# Altium PCB Diffusor_1.3.PcbDoc
Units mm, origin at the board's own origin, x right, y up, seen from the top; angles counter-clockwise.
Board outline 55 x 44.5 mm, 2 copper layers (Top Layer, Bottom Layer), stack 1.571 mm thick; 81 components, 55 nets, 236 pads, 1 vias.
Unrouted connection lines stored in the file: 1.
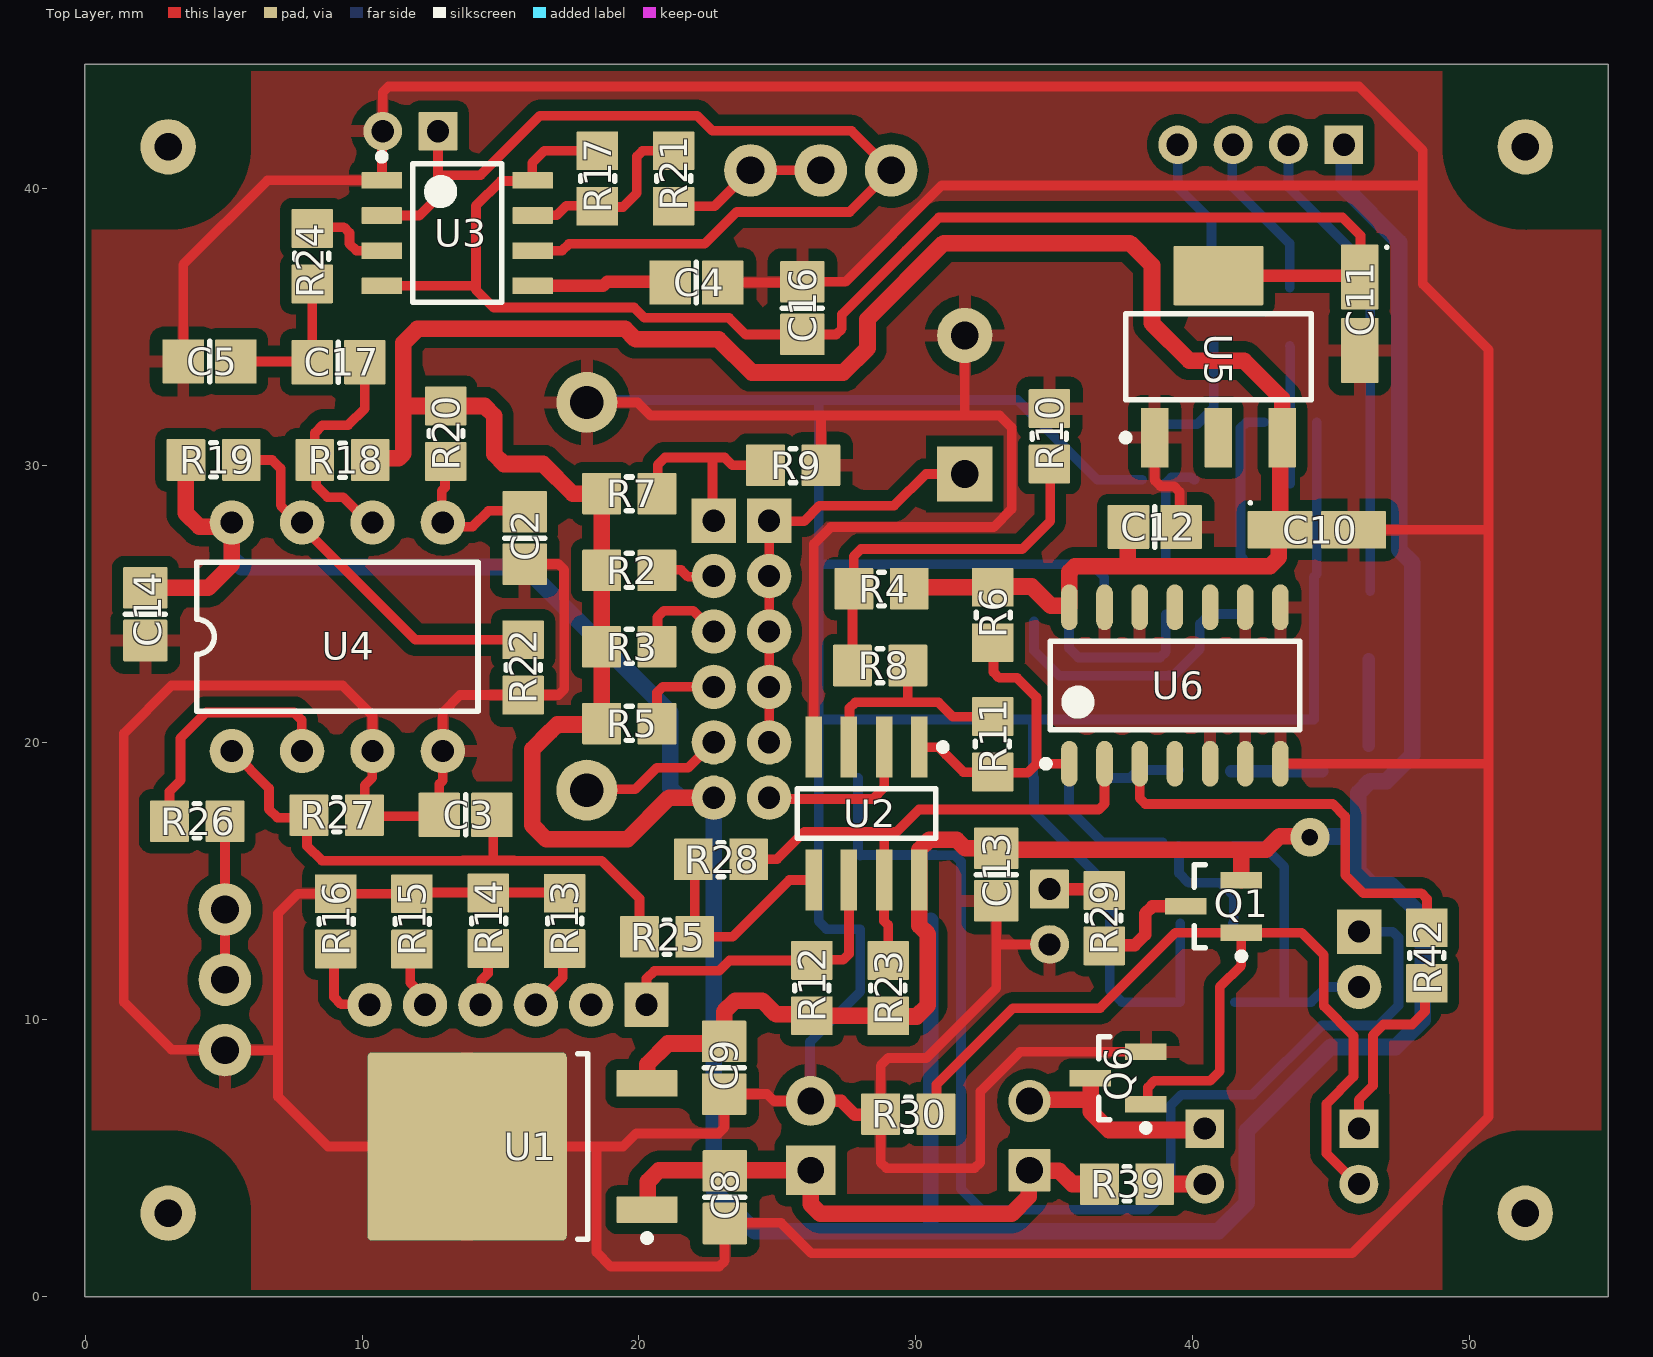
[diagram p0: Top Layer view]
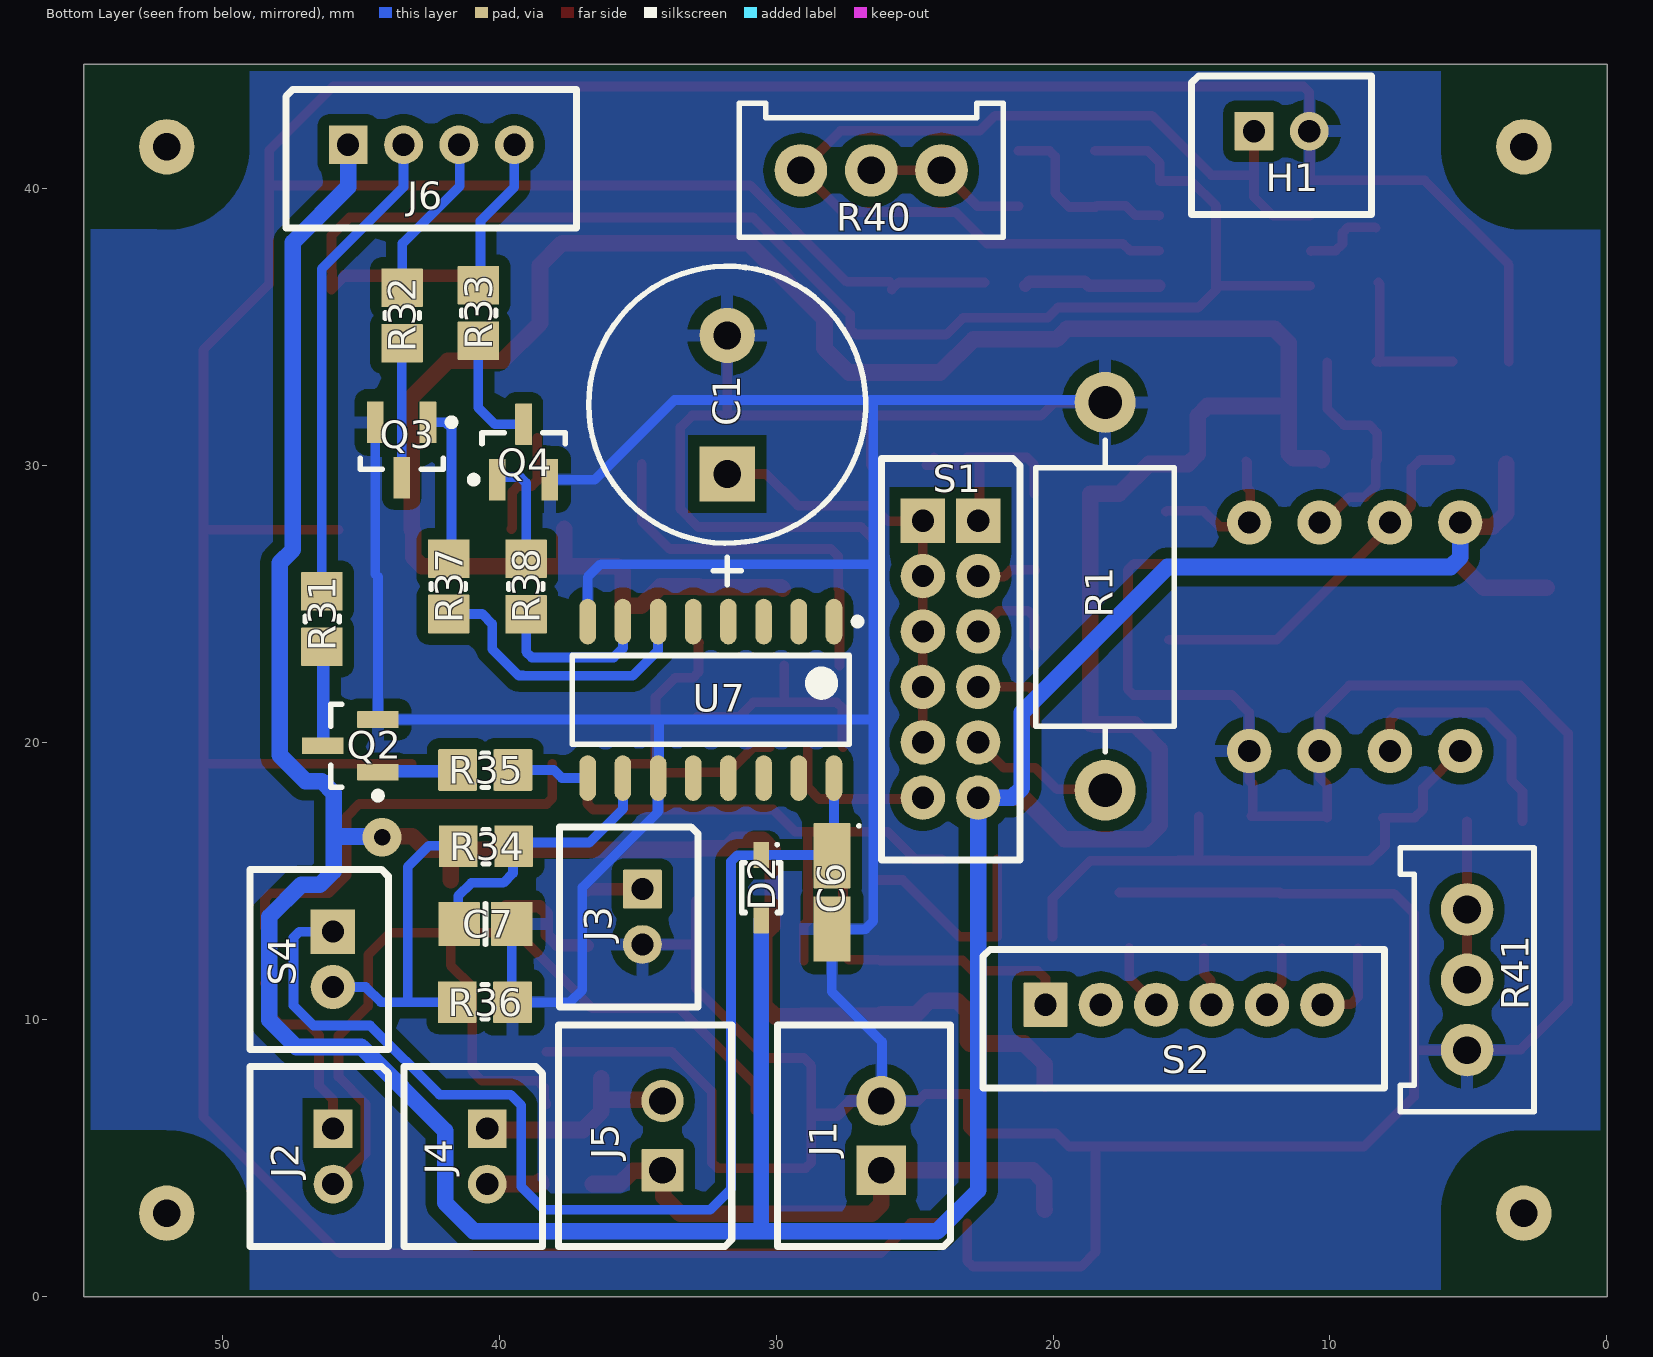
[diagram p1: Bottom Layer view, seen from below]
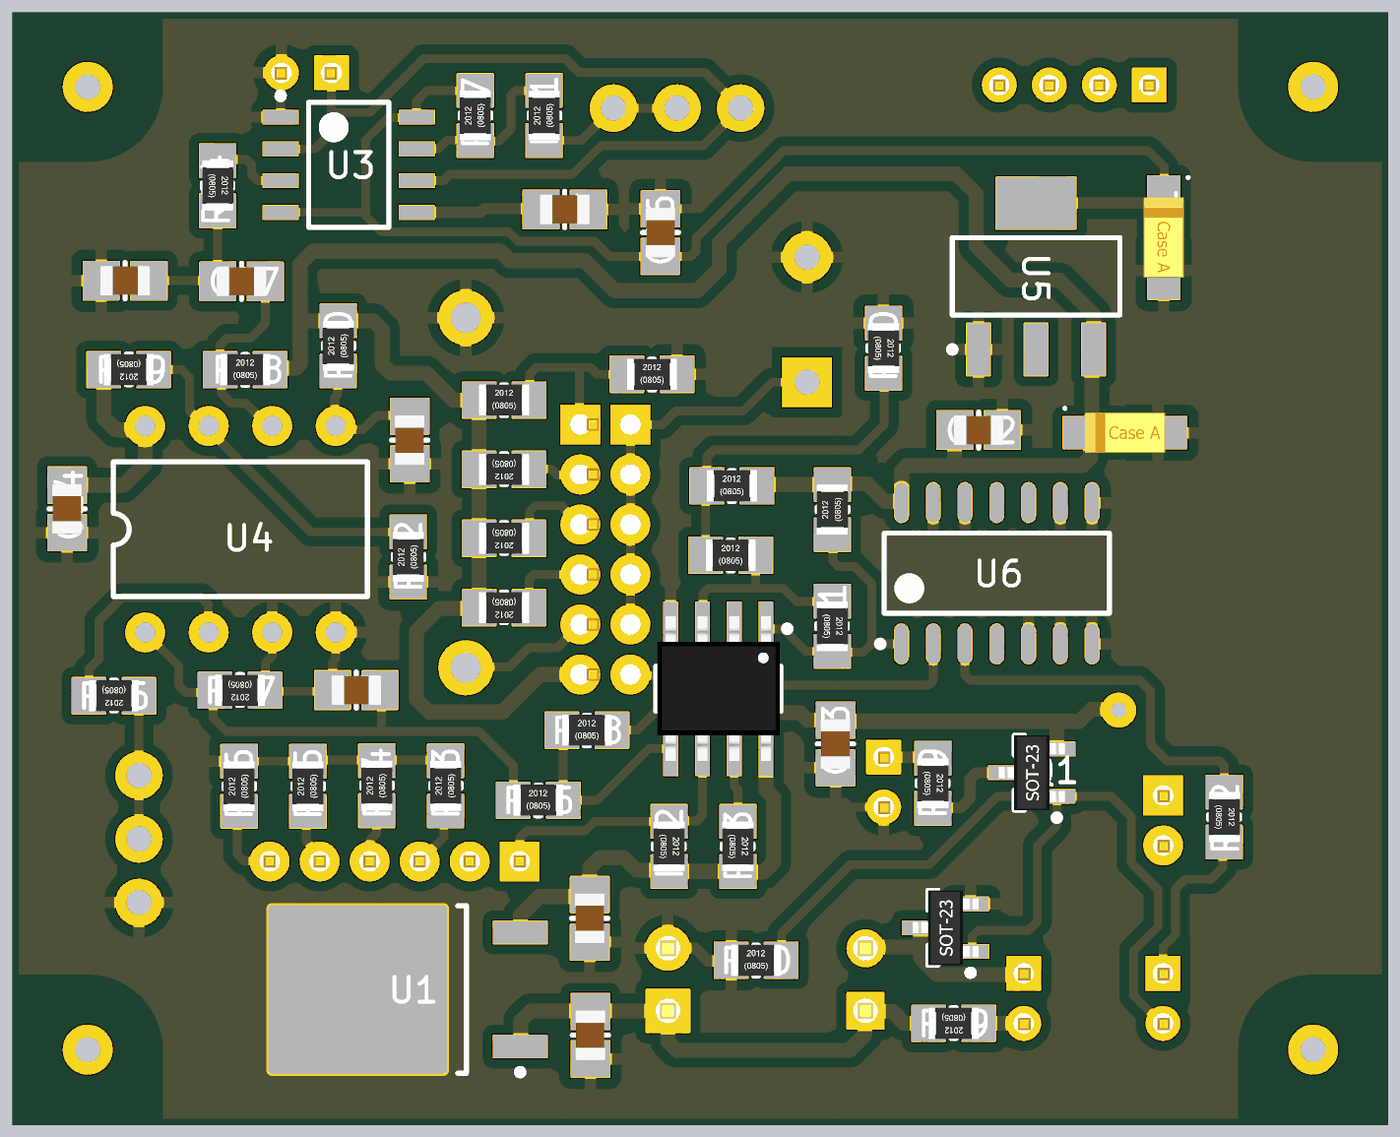
[diagram p2: 3D render of the assembled board from above, using the file's embedded part models]
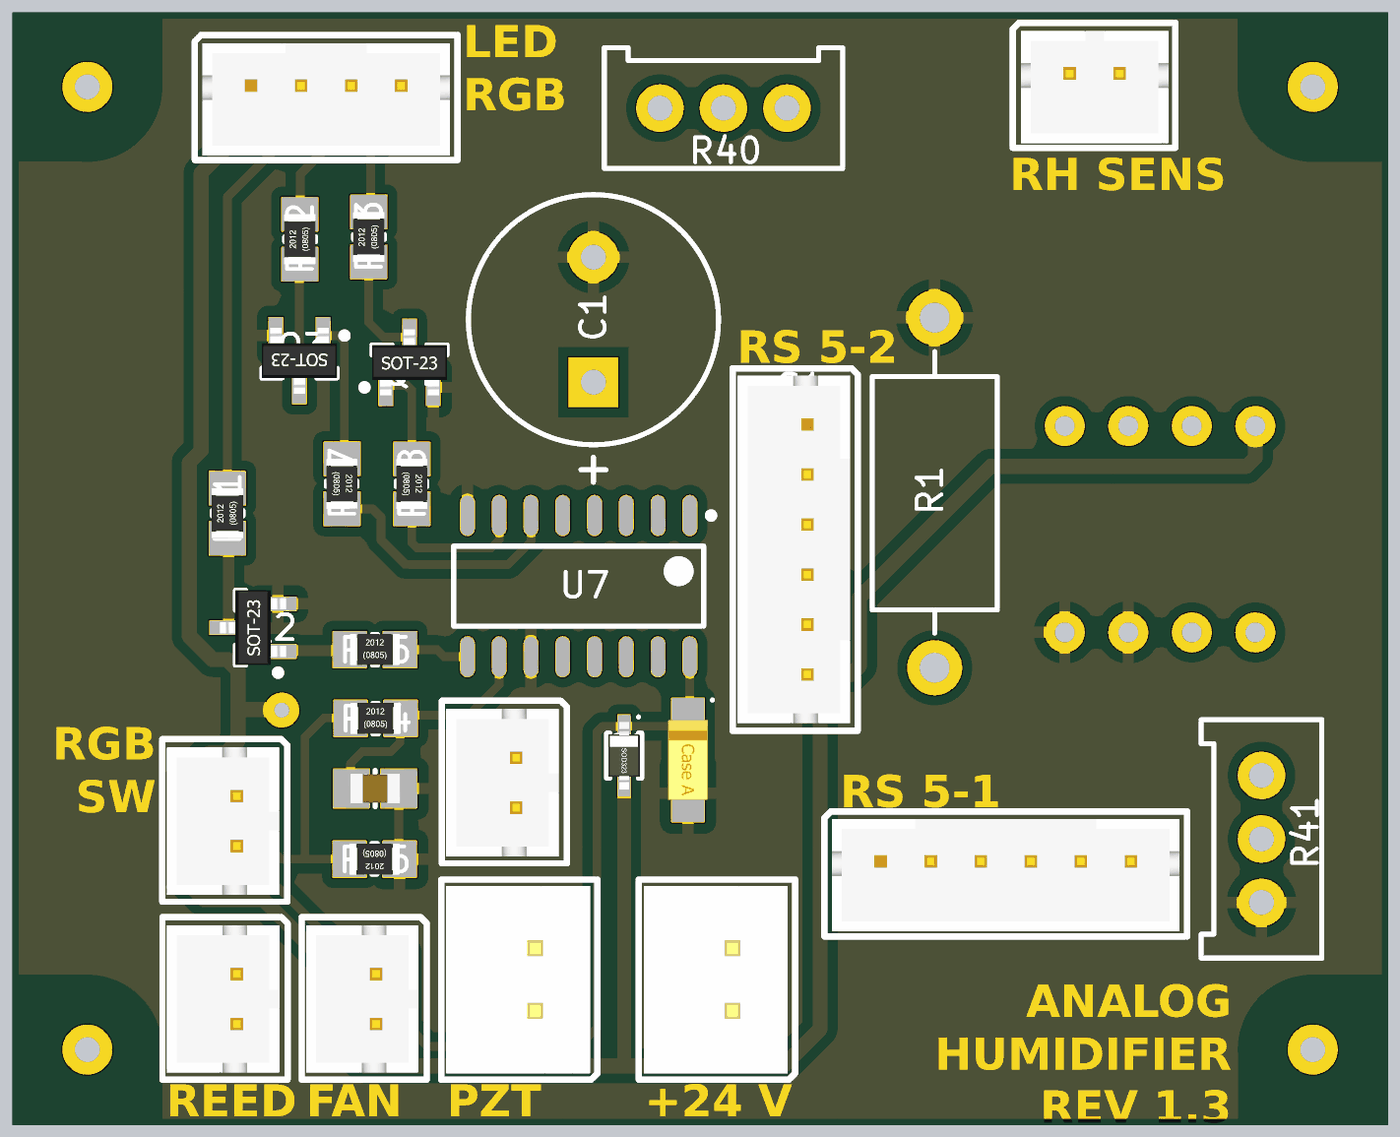
[diagram p3: 3D render of the assembled board from below, using the file's embedded part models]

## Layer stack, top to bottom
Top Solder: solder mask 0.0102, Solder Resist, Dk 3.5
Top Layer: signal copper 0.0356
Dielectric 1: dielectric 1.5, FR-4, Dk 4.8
Bottom Layer: signal copper 0.0356
Bottom Solder: solder mask 0.0102, Solder Resist, Dk 3.5

## Board outline
-0.007,-0.02 54.993,-0.02 54.993,44.48 -0.007,44.48

## Design rules (kind name [scope] priority, off if disabled: settings)
AcuteAngle [All] p1 off: minimum=6.00000000000000E+0001 checktracksonly=FALSE
AssemblyTestPointUsage [All] p1 off:
AssemblyTestpoint [All] p1 off: testpointundercomponent=TRUE minsize=1.016 maxsize=2.54 preferedsize=1.524 minholesize=0 maxholesize=1.016 preferedholesize=0.813 testpointgrid=0.025 usegrid=TRUE gridtolerance=0 allowsidetop=TRUE allowsidebottom=TRUE
BoardOutlineClearance [All] p1: gap=0.25 ignorepadtopadclearanceinfootprint=FALSE // Отступ от края ПП при скрайбировании
Clearance "Opt Mounting Holes Clearance bottom" [IsPad and (Name = 'Free-OPT_MH') vs OnBottomLayer or OnMultiLayer] p1: gap=2 ignorepadtopadclearanceinfootprint=FALSE // Зазор крепежных отверстий
Clearance "Mounting Holes Clearance" [IsPad and (not PadIsPlated) and OnMultiLayer and not InAnyComponent and not (Name = 'Free-OPT_MH')] p2: gap=2 ignorepadtopadclearanceinfootprint=FALSE // Зазор крепежных отверстий
Clearance "Unplated pad Clearance" [IsPad and OnMultiLayer and (not PadIsPlated)] p3: gap=0.3 ignorepadtopadclearanceinfootprint=FALSE except(0.4: Arc-Fill Arc-Poly Arc-Region Track-Fill Track-Poly Track-Region SMDPad-Fill SMDPad-Poly SMDPad-Region THPad-Fill THPad-Poly THPad-Region Via-Fill Via-Poly Via-Region Fill-Fill Fill-Poly Fill-Region Poly-Poly Poly-Region Region-Region) // Отступ меди от неметаллизированного отверстия
Clearance "Poly Clearance" [InNetClass('PWR') and not InAnyComponent] p4: gap=0.3 ignorepadtopadclearanceinfootprint=FALSE // Зазор полигон-всё по Резониту
Clearance "Class 4 Clearance" [All] p5: gap=0.3 ignorepadtopadclearanceinfootprint=FALSE except(0.4: Arc-Fill Arc-Poly Arc-Region Track-Fill Track-Poly Track-Region SMDPad-Fill SMDPad-Poly SMDPad-Region THPad-Fill THPad-Poly THPad-Region Via-Fill Via-Poly Via-Region Fill-Fill Fill-Poly Fill-Region Poly-Poly Poly-Region Region-Region) // Технологическое правило 4 класс точности ПП
ComponentClearance ComponentClearance_1 [All] p1: gap=0.254 collisioncheckmode=3 verticalgap=0.254 showdistances=FALSE
ComponentClearance ComponentClearance_141V [(ObjectKind = 'Component') And (Comment Like '141V*') vs (ObjectKind = 'Component') And (Comment Like '141V*')] p2: gap=-0.5 collisioncheckmode=3 verticalgap=0.254 showdistances=FALSE // Для разъемов 141V
ComponentClearance [InComponent('ISP1')] p3: gap=0.05 collisioncheckmode=3 verticalgap=0.1 showdistances=FALSE
ComponentOrientations [All] p1: allowedrotations=27
DiffPairsRouting [All] p1: maxlimit=0.254 minlimit=0.254 mostfreqgap=0.254 toplayer_minwidth=0.381 toplayer_maxwidth=0.381 toplayer_prefwidth=0.381 bottomlayer_minwidth=0.381 bottomlayer_maxwidth=0.381 bottomlayer_prefwidth=0.381 maxuncoupledlength=15
FabricationTestPointUsage [All] p1 off: valid=0 allowmultiple=FALSE
FabricationTestpoint [All] p1 off: side=3 testpointundercomponent=TRUE minsize=1.016 maxsize=2.54 preferedsize=1.524 minholesize=0 maxholesize=1.016 preferedholesize=0.813 testpointgrid=0.025 allowsidetop=TRUE allowsidebottom=TRUE usegrid=TRUE gridtolerance=0
Height [All] p1 off: minheight=0 maxheight=25.4 prefheight=12.7
HoleSize "Unplated HoleSize" [IsPad and OnMultiLayer and (not PadIsPlated)] p1: absolutevalues=TRUE maxlimit=10 minlimit=0.5 maxpercent=80.000 minpercent=20.000
HoleSize "Plated HoleSize" [IsVia or (IsPad and OnMultiLayer and PadIsPlated)] p2: absolutevalues=TRUE maxlimit=10 minlimit=0.3 maxpercent=80.000 minpercent=20.000 // Мин. диаметр металлизированного отверстия
HoleToHoleClearance [All] p1: gap=0.2 allowstackedmicrovias=TRUE
MinimumAnnularRing "MinimumAnnularRing Pad" [IsPad] p1: minimumring=0.2 // Мин. поясок КП
MinimumAnnularRing "MinimumAnnularRing Via" [IsVia] p2: minimumring=0.15 // Мин. поясок переходного отверстия
MinimumSolderMaskSliver [All] p1: minsoldermaskwidth=0.15 // Масочный мостик между КП
PasteMaskExpansion [All] p1: expansion=-0.025
PermittedLayers [All] p1: toplayerpermitted=TRUE bottomlayerpermitted=TRUE
PlaneClearance [All] p1: clearance=0.45
PlaneConnect Via_PlaneConnect [isvia] p1: planeconnectstyle=Direct reliefexpansion=0.508 reliefentries=4 reliefconductorwidth=0.254 reliefairgap=0.254
PlaneConnect [All] p2: planeconnectstyle=Relief reliefexpansion=0.2 reliefentries=4 reliefconductorwidth=0.45 reliefairgap=0.45
PolygonConnect "Direct PolygonConnect" [IsVia or InComponentClass('PowerPads')] p1: connectstyle=Direct reliefconductorwidth=0.254 reliefentries=4 polygonreliefangle="90 Angle" airgapwidth=0.254 // Подключение подлигонов к via напрямую
PolygonConnect [All] p2: connectstyle=Relief reliefconductorwidth=0.45 reliefentries=4 polygonreliefangle="90 Angle" airgapwidth=0.45 // Геометрия термобарьера
RoutingCorners [All] p1: cornerstyle=45-Degree minsetback=0.508 maxsetback=0.508
RoutingVias ComponentRoutingVias [IsComponentVia] p1: holewidth=0.6 width=1.3 viastyle="Through Hole" minholewidth=0.6 minwidth=1.3 maxholewidth=0.7 maxwidth=1.4
RoutingVias "Power RoutingVias" [InNetClass('PWR') and not InComponentClass('VIP')] p2: holewidth=0.6 width=1.3 viastyle="Through Hole" minholewidth=0.6 minwidth=1.3 maxholewidth=0.6 maxwidth=1.3 // Via силовых цепей
SilkToSilkClearance [IsObjectKind('Text') vs IsObjectKind('Text')] p1: silktosilkclearance=0.15
SilkToSolderMaskClearance [IsPad] p1: minsilkscreentomaskgap=0.05 clearancetoexposedcopper=TRUE
SolderMaskExpansion "Via SolderMaskExpansion" [IsVia and not InAnyComponent] p1: expansion=0 istentingtop=FALSE // Закрыть via маской
SolderMaskExpansion "Technological SolderMaskExpansion" [All] p2: expansion=0.05 istentingtop=FALSE // Припуск паяльной маски по Резониту
SupplyNets "Schematic Supply Nets_4" [InNet('+5')] p1: voltage=0.000
SupplyNets "Schematic Supply Nets_2" [InNet('+12')] p2: voltage=0.000
SupplyNets "Schematic Supply Nets_1" [InNet('+24')] p3: voltage=0.000
SupplyNets "Schematic Supply Nets" [InNet('GND')] p4: voltage=0.000
ViasUnderSMD ViasUnderSMD_VIP [HasFootprint('ESOP-8_N')] p1: allowed=TRUE
ViasUnderSMD [All] p2: allowed=FALSE
Width [All] p1: maxlimit=0.762 minlimit=0.2 preferedwidth=0.254 minimp=50.000000 maximp=50.000000 favimp=50.000000
Width "Power Width" [InNetClass('PWR')] p2: maxlimit=5 minlimit=0.3 preferedwidth=0.5 // Ширина проводников силовых цепей
Width "Single-ended 50 Ohm" [All] p3: maxlimit=0.6 minlimit=0.3 preferedwidth=0.35 minimp=50.000000 maximp=50.000000 favimp=50.000000 // Ширина проводников не силовых цепей
Width "Class 4 Width" [All] p4: maxlimit=10 minlimit=0.3 preferedwidth=0.35 minimp=50.000000 maximp=50.000000 favimp=50.000000 // Минимальная ширина проводника по 4 классу точности ПП
14 further rules are at their usual default settings.

## Components (designator, comment, footprint, x,y, rotation, side; value= is the part's Value field where it differs from the comment)
C1 "ECAP-1020" ecap1020 31.763,29.689 r90 bottom value="1000uF 16V"
C2 "CAPC_0805" CAPC2012-0805M 15.875,27.375 r270 top value=10nF
C3 "CAPC_0805" CAPC2012-0805M 13.742,17.379 r0 top value=1uF
C4 "CAPC_0805" CAPC2012-0805M 22.075,36.6 r180 top value=100nF
C5 "CAPC_0805" CAPC2012-0805M 4.496,33.75 r0 top value=2.2nF
C6 "TCAPC_A" TCAPC_A_M 27.981,14.58 r270 bottom value=10uF
C7 "CAPC_0805" CAPC2012-0805M 40.492,13.441 r0 bottom value=100nF
C8 "CAPC_0805" CAPC2012-0805M 23.1,3.575 r90 top value=330nF
C9 "CAPC_0805" CAPC2012-0805M 23.075,8.25 r90 top value=100nF
C10 "TCAPC_A" TCAPC_A_M 44.475,27.671 r0 top value=10uF
C11 "TCAPC_A" TCAPC_A_M 46.025,35.475 r270 top value=10uF
C12 "CAPC_0805" CAPC2012-0805M 38.625,27.775 r180 top value=100nF
C13 "CAPC_0805" CAPC2012-0805M 32.9,15.225 r90 top value=100nF
C14 "CAPC_0805" CAPC2012-0805M 2.175,24.625 r90 top value=100nF
C16 "CAPC_0805" CAPC2012-0805M 25.9,35.675 r270 top value=100nF
C17 "CAPC_0805" CAPC2012-0805M 9.15,33.725 r0 top value=470pF
D2 "1N4148WS" SOD323_M 30.536,14.755 r270 bottom
H1 "HS1101" B2B-PH-K-S#1 10.747,42.063 r270 bottom
J1 "CWF-2" CWF-2#1 26.2,4.55 r0 bottom
J2 "B2B-PH-K-S" B2B-PH-K-S#2 45.996,4.05 r0 bottom
J3 "B2B-PH-K-S" B2B-PH-K-S#1 34.825,12.7 r0 bottom
J4 "B2B-PH-K-S" B2B-PH-K-S#1 40.427,4.05 r0 bottom
J5 "CWF-2" CWF-2#2 34.1,4.55 r0 bottom
J6 "B4B-PH-K-S" B4B-PH-K-S 43.45,41.575 r270 bottom
Q1 "IRLML5103TR" SOT23-3M 40.75,14.075 r180 top
Q2 "IRLML2030" SOT23-3M 45.375,19.875 r0 bottom
Q3 "IRLML2030" SOT23-3M 43.518,30.554 r270 bottom
Q4 "IRLML2030" SOT23-3M 39.118,30.484 r90 bottom
Q6 "IRLML2803" SOT23-3M 37.3,7.875 r180 top
R1 "RES_KNP200_R" KNP200 18.118,35.27 r270 bottom value=100
R2 "RESC_0805_R" RESC2012-0805M 19.65,26.204 r180 top value=1.8M
R3 "RESC_0805_R" RESC2012-0805M 19.65,23.45 r180 top value=3.6M
R4 "RESC_0805_R" RESC2012-0805M 28.759,25.547 r0 top value=10k
R5 "RESC_0805_R" RESC2012-0805M 19.65,20.675 r180 top value=7.2M
R6 "RESC_0805_R" RESC2012-0805M 32.773,24.597 r90 top value=10k
R7 "RESC_0805_R" RESC2012-0805M 19.65,28.979 r0 top value=10k
R8 "RESC_0805_R" RESC2012-0805M 28.709,22.772 r0 top value=100k
R9 "RESC_0805_R" RESC2012-0805M 25.568,30.005 r0 top value=10k
R10 "RESC_0805_R" RESC2012-0805M 34.821,31.05 r270 top value=17k
R11 "RESC_0805_R" RESC2012-0805M 32.773,19.931 r270 top value=10M
R12 "RESC_0805_R" RESC2012-0805M 26.246,11.125 r270 top value=10k
R13 "RESC_0805_R" RESC2012-0805M 17.313,13.55 r90 top value=49,3k
R14 "RESC_0805_R" RESC2012-0805M 14.559,13.555 r90 top value=44,3k
R15 "RESC_0805_R" RESC2012-0805M 11.804,13.533 r90 top value=40.4k
R16 "RESC_0805_R" RESC2012-0805M 9.05,13.533 r90 top value=37.3k
R17 "RESC_0805_R" RESC2012-0805M 18.496,40.354 r90 top value=50k
R18 "RESC_0805_R" RESC2012-0805M 9.297,30.193 r0 top value=10k
R19 "RESC_0805_R" RESC2012-0805M 4.643,30.193 r180 top value=10k
R20 "RESC_0805_R" RESC2012-0805M 13.021,31.143 r90 top value=6.81k
R21 "RESC_0805_R" RESC2012-0805M 21.25,40.354 r90 top value=499k
R22 "RESC_0805_R" RESC2012-0805M 15.818,22.705 r90 top value=68k
R23 "RESC_0805_R" RESC2012-0805M 29,11.125 r270 top value=10k
R24 "RESC_0805_R" RESC2012-0805M 8.2,37.55 r270 top value=1k
R25 "RESC_0805_R" RESC2012-0805M 21.017,12.975 r0 top value=100k
R26 "RESC_0805_R" RESC2012-0805M 4.05,17.15 r180 top value=12k
R27 "RESC_0805_R" RESC2012-0805M 9.088,17.372 r180 top value=120k
R28 "RESC_0805_R" RESC2012-0805M 22.961,15.775 r0 top value=1M
R29 "RESC_0805_R" RESC2012-0805M 36.796,13.65 r270 top value=500
R30 "RESC_0805_R" RESC2012-0805M 29.725,6.575 r0 top value=10k
R31 "RESC_0805_R" RESC2012-0805M 46.4,24.45 r90 bottom value=560
R32 "RESC_0805_R" RESC2012-0805M 43.504,35.409 r90 bottom value=560
R33 "RESC_0805_R" RESC2012-0805M 40.75,35.5 r90 bottom value=470
R34 "RESC_0805_R" RESC2012-0805M 40.475,16.246 r180 bottom value=10k
R35 "RESC_0805_R" RESC2012-0805M 40.5,19 r180 bottom value=1k
R36 "RESC_0805_R" RESC2012-0805M 40.515,10.617 r0 bottom value=100k
R37 "RESC_0805_R" RESC2012-0805M 41.818,25.629 r270 bottom value=1k
R38 "RESC_0805_R" RESC2012-0805M 39.025,25.625 r270 bottom value=1k
R39 "RESC_0805_R" RESC2012-0805M 37.625,4.05 r180 top value=510
R40 "Trim_3296W" Trim_3296W 24.025,40.65 r90 bottom value=50k
R41 "Trim_3296W" Trim_3296W 5.05,13.965 r0 bottom value=5k
R42 "RESC_0805_R" RESC2012-0805M 48.45,12.3 r270 top value=1k
S1 "Rotary Switch 5-2" "B12B-PHDSS 2mm 2х6pin" 22.7,28 r0 bottom
S2 "Rotary Switch 5-1" "B6B for rotary switch" 20.275,10.525 r270 bottom
S4 "Switch" B2B-PH-K-S#3 46.001,11.165 r0 bottom
U1 "MC78M12" MC78M12CDTG_DPAK 15.793,5.405 r180 top
U2 "LM393" SOIC127P600-8N 28.216,17.429 r270 top
U3 "TLC555" TLC555 13.439,38.384 r0 top
U4 "LM331" "LM331 DIP8" 5.298,19.684 r90 top
U5 "LD1117-5.0" SOT230P700X165-4N 40.921,33.925 r90 top
U6 "CD4071" CD4071_SOIC14 39.35,22.05 r90 top
U7 "CD4040BM/TR" CD4040BM/TR_TSOP16 32.355,21.534 r270 bottom

## Footprints (in the part's own frame and the unit in brackets; to place one, negate y for a bottom-side part, rotate by r counter-clockwise, add the part's x,y. Pads: shape width x height; smd on the part's side, far side on the other; paste and mask are expansions set on the pad)
B2B-PH-K-S#1 [mm] "JST PH connector pitch 2.0 mm PCB mounted"
  rrect5% 1.4x1.4 hole 0.8: 1(0,-2)
  round 1.4 hole 0.8: 2(0,0)
  silkscreen extent -2,-4.25 3,2.25, body extent -1.68,-3.92 2.82,1.98, height 6
B2B-PH-K-S#2 [mm] "JST PH connector pitch 2.0 mm PCB mounted"
  rect 1.4x1.4 hole 0.8: 1(0,-2)
  round 1.4 hole 0.8: 2(0,0)
  silkscreen extent -2,-4.25 3,2.25, body extent -1.68,-3.92 2.82,1.98, height 6
B2B-PH-K-S#3 [mm] "JST PH connector pitch 2.0 mm PCB mounted"
  rect 1.6x1.6 hole 0.8: 1(0,-2)
  round 1.6 hole 0.8: 2(0,0)
  silkscreen extent -2,-4.25 3,2.25, body extent -1.68,-3.92 2.82,1.98, height 6
B4B-PH-K-S [mm] "JST PH connector pitch 2.0 mm PCB mounted"
  rrect5% 1.4x1.4 hole 0.8: 1(0,-2)
  round 1.4 hole 0.8: 2(0,0) 3(0,2) 4(0,4)
  silkscreen extent -2,-4.25 3,6.25, body extent -1.68,-3.95 2.82,5.95, height 6
"B6B for rotary switch" [mm]
  round 1.6 hole 0.8: 1(0,2) 2(0,4) 3(0,6) 4(0,8) 5(0,10)
  rrect5% 1.6x1.6 hole 0.8: A(0,0)
  silkscreen extent -2,-2.25 3,12.25, body extent -1.7,-1.95 2.8,11.95, height 6
"B12B-PHDSS 2mm 2х6pin" [mm]
  round 1.6 hole 0.8: 1(0,8) 2(0,2) 3(0,4) 4(0,6) 6(0,10) 7(2,4) 8(2,6) 9(2,8) A(2,2) B(2,10)
  rect 1.6x1.6 hole 0.8: 5(0,0) 10(2,0)
  silkscreen extent -1.5,-2.25 3.5,12.25, body extent -1.2,-1.95 3.3,11.95, height 6
CAPC2012-0805M [mm] "Chip Capacitor, Body 2.0x1.3mm, IPC Low Density"
  rrect5% 1.5x1.6 smd: 1(-0.95,0) 2(0.95,0)
  silkscreen extent 0,-0.72 0,0.72, body extent -1,-0.6 1,0.6, height 0.95
CD4040BM/TR_TSOP16 [mm] "TSOP, 16-Leads, Body 9,90x3,90mm, Pitch 1,27mm, IPC Medium Density"
  oval 1.65x0.6 smd: 1(-2.825,4.445) 2(-2.825,3.175) 3(-2.825,1.905) 4(-2.825,0.635) 5(-2.825,-0.635) 6(-2.825,-1.905) 7(-2.825,-3.175) 8(-2.825,-4.445) 9(2.825,-4.445) 10(2.825,-3.175) 11(2.825,-1.905) 12(2.825,-0.635) 13(2.825,0.635) 14(2.825,1.905) 15(2.825,3.175) 16(2.825,4.445)
  silkscreen extent -2.95,-5 1.6,5.42, body extent -2,-5 2,5, height 1.55
CD4071_SOIC14 [mm] "SOIC, 14-Leads, Body 10,20x5,30mm, Pitch 1,27mm, IPC Medium Density"
  oval 1.65x0.6 smd: 1(-2.825,3.81) 2(-2.825,2.54) 3(-2.825,1.27) 4(-2.825,0) 5(-2.825,-1.27) 6(-2.825,-2.54) 8(2.825,-3.81) 9(2.825,-2.54) 10(2.825,-1.27) 11(2.825,0) 12(2.825,1.27) 13(2.825,2.54) GND(-2.825,-3.81) VCC(2.825,3.81)
  silkscreen extent -2.95,-4.5 1.6,4.78, body extent -2,-4.5 2,4.5, height 1.57
CWF-2#1 [mm]
  rrect5% 1.8x1.8 hole 0.965: 1(0,0)
  round 1.8 hole 0.965: 2(0,-2.5)
  silkscreen extent -2.5,-5.25 3.75,2.75, body extent -2.2,-5 3.55,2.5, height 7
CWF-2#2 [mm]
  rrect5% 1.524x1.524 hole 0.965: 1(0,0)
  round 1.524 hole 0.965: 2(0,-2.5)
  silkscreen extent -2.5,-5.25 3.75,2.75, body extent -2.2,-5 3.55,2.5, height 7
ecap1020 [mm] "Electrolytic capacitor D 10mm H 10mm pitch 5mm"
  rect 2x2 hole 1: 1(0,0)
  round 2 hole 1: 2(5,0)
  silkscreen extent -4,-5 7.5,5, body extent -2.5,-5 7.5,5, height 17.5
KNP200 [mm] "Resistor THT KNP 2W"
  round 2.2 hole 1.2: 1(3,0) 2(17,0)
  silkscreen extent 4.36,-2.5 15.61,2.5
"LM331 DIP8" [mm]
  round 1.6 hole 0.8: 1(0,0) 2(0,-2.54) 3(0,-5.08) 4(0,-7.62) 5(8.255,-7.62) 6(8.255,-5.08) 7(8.255,-2.54) 8(8.255,0)
  silkscreen extent 1.43,-8.89 6.82,1.27
MC78M12CDTG_DPAK [mm] "D-PAK, 3-Pads, Body 6,20x6,72mm (max), IPC Medium Density"
  rrect5% 2.2x0.95 smd: 1(-4.5,2.28) 3(-4.5,-2.28)
  rrect5% 7.2x6.8 smd: 2(2,0)
  silkscreen extent -4.62,-3.35 -2,3.43, body extent -2.35,-3.35 3.85,3.35, height 2.38
RESC2012-0805M [mm] "Chip Resistor, Body 2.0x1.3mm, IPC Low Density"
  rrect5% 1.4x1.5 smd: 1(-1,0) 2(1,0)
  silkscreen extent -0.1,-0.63 0.1,0.6, body extent -1,-0.62 1,0.63, height 0.45
SOD323_M [mm] "SOD, 2-Leads, Body 1.25x2.50mm, IPC Low Density"
  rrect5% 0.95x0.55 smd: 1(-1.175,0) 2(1.175,0)
  silkscreen extent -1.6,-0.7 0.9,0.7, body extent -1.35,-0.63 1.35,0.62, height 1.1
SOIC127P600-8N [mm] "SOIC, 8-Leads, Body 4.9x3.9mm, Pitch 1.27mm, IPC Medium Density"
  rrect5% 2.2x0.6 smd: 1(-2.4,1.905) 2(-2.4,0.635) 3(-2.4,-0.635) 4(-2.4,-1.905) 5(2.4,-1.905) 6(2.4,-0.635) 7(2.4,0.635) 8(2.4,1.905)
  silkscreen extent -2.52,-2.5 0.9,2.88, body extent -2.9,-2.44 2.88,2.46, height 1.45
SOT23-3M [mm] "SOT23, 3-Leads, Body 2.9x1.3mm, Pitch 0.95mm, Lead Span 2.5mm, IPC Low Density"
  rrect5% 1.5x0.6 smd: 1(-1,0.95) 2(-1,-0.95) 3(1,0)
  silkscreen extent -1.13,-1.5 0.7,1.92, body extent -1.32,-1.5 1.32,1.5, height 1.08
SOT230P700X165-4N [mm] "SOT223, 4-Leads, Body 6,30x7,00mm (avg), Pitch 2,30mm, IPC Medium Density"
  rrect5% 2.15x1 smd: 1(-2.925,2.3) 2(-2.925,0) 3(-2.925,-2.3)
  rrect5% 2.15x3.25 smd: 4(2.925,0)
  silkscreen extent -3.05,-3.35 1.55,3.47, body extent -1.85,-3.35 1.85,3.35, height 1.65
TCAPC_A_M [mm] "Molded Capacitor, 2-Leads, Body 3.20x1.60mm, IPC Low Density"
  rrect5% 2.35x1.35 smd: 1(-1.325,0) 2(1.325,0)
  silkscreen extent -2.45,0.92 -2.35,1.02, body extent -1.6,-0.8 1.6,0.8, height 1.6
TLC555 [mm]
  rrect5% 1.45x0.6 smd: 1(-2.725,1.905) 2(-2.725,0.635) 3(-2.725,-0.635) 4(-2.725,-1.905) 5(2.725,-1.905) 6(2.725,-0.635) 7(2.725,0.635) 8(2.725,1.905)
  silkscreen extent -2.85,-2.5 1.6,2.88, body extent -2,-2.5 2,2.5, height 1.75
Trim_3296W [mm] "Trimming resistor multinurn Bourns series 3296W"
  round 1.9 hole 1: 1(0,0) 2(0,2.54) 3(0,5.08)
  silkscreen extent -2.41,-2.22 2.41,7.3, body extent -2.41,-2.22 2.41,7.3, height 11

## Part data
C1: "Capacitor electrolytic 5 mm pitch, 10*20 body 5pitch"
C2 C3 C4 C5 C7 C8 C9 C12 C13 C14 C16 C17: "Capacitor 0805"
C6 C10 C11: "Capacitor tantalum SMD type A"
D2: "1N4148WS switching Si diode"
J2 J3 J4 J6: "B2B-PH-K-S 2.0 mm pitrch header PCB straight"
Q1: library part IRLML6402
Q2 Q3 Q4: "IRLML2030 Hexfet power MOSFET"
Q6: "HEXFET Power MOSFET", ComponentLink1Description="Manufacturer Link", ComponentLink1URL=http://www.irf.com/, ComponentLink2Description=Datasheet, ComponentLink2URL=http://www.irf.com/product-info/datasheets/data/irlml2803.pdf, DatasheetVersion=Aug-1997, LatestRevisionDate=20-Nov-2009, LatestRevisionNote="IPC-7351 Footprint Added.", PackageDescription="3-Pin SOT-23 Package 0.95 mm Pitch, 2.3 mm Lead Span", PackageReference=SOT-23, Published=8-Jun-2000, Publisher="Altium Limited"
R1: "Resistor THT axial KNP200 2W"
R2 R3 R4 R5 R6 R7 R8 R9 R10 R11 R12 R13 R14 R15 R16 R17 R18 R19 R20 R21 R22 R23 R24 R25 R26 R27 R28 R29 R30 R31 R32 R33 R34 R35 R36 R37 R38 R39 R42: "Resistor 0805"
R40 R41: "Trimming resistor multinurn Bourns series 3296W"
U1 U5: library part MC78M12CDTG, "Linear Regulator", DigiKeyPartNumber=LM1117T-5.0-ND, Manufacturer="National Semiconductor", PackageTopMarking=NSUZXYTTE#*LM1117T*5.0, PartNumber=LM1117T-5.0, PowerWise=N, ComponentLink1Description="LM1117 Datasheet", ComponentLink1URL=http://www.national.com/ds/LM/LM1117.pdf, ComponentLink2Description="LM1117 Web Page", ComponentLink2URL=http://www.national.com/pf/LM/LM1117.html, ComponentLink3Description="T03B Package Page", ComponentLink3URL=http://www.national.com/packaging/folders/t03b.html, CompType="LDO IC", DatasheetVersion=Apr-2006, PackageDescription="TO-220, Molded, 3 Lead, Straight", PackageReference=T03B, PackageVersion="revL, Jan-1992", PinCount=3, Published=4-Dec-2008, Publisher="Altium Limited", RoHS=O
U2: library part LM393/293/2903, "Low-Power Low Offset Voltage Dual Comparator"
U6: "2-Input OR Gate", Code_IPC=SOT353-5, Code_JEITA=SC-88A, ComponentLink1Description="Manufacturer Link", ComponentLink1URL=http://sg.renesas.com/fmwk.jsp?cnt=unilogic_hc_root.jsp&fp=/products/standard_ic/general_purpose_logic/uni_logic/unilogic_hc/, ComponentLink2Description=Datasheet, ComponentLink2URL=http://documentation.renesas.com/eng/products/logic/rej03d0187_hd74hc1g32.pdf, ComponentLink3Description="Packaging Specification", ComponentLink3URL=http://sg.renesas.com/media/products/common_info/package/pdf/ic/code/ptsp0005zc_a.pdf, DatasheetVersion="Rev.5.00, Jan-2004", PackageDescription="5-Pin Plastic SOT-353 Package 0.65 mm Pitch, 2.1 mm Lead Span", PackageReference=PTSP0005ZC-A, PackageVersion=Jan-2005, Published=10-Feb-2010, Publisher="Altium Limited"
S4: LatestRevisionDate=17-Jul-2002, LatestRevisionNote="Re-released for DXP Platform.", PackageReference=SPST-2, Published=24-Mar-1999, Publisher="Altium Limited"

## Free pads (board coordinates)
  round 2 hole 1 unplated: 2(3,3) 2(3,41.5) 2(52,3) 2(52,41.5)

## Via types
v1: diameter 1.4, hole 0.6, Top Layer to Bottom Layer, 1 vias

## Nets (pads, with @x,y where several pads share a name; then routed paths per layer and width w, separated by ;. In a path a pad name is that pad's centre, name@x,y a point inside that pad or via, vN(x,y) a via of type N, cw(c..) or ccw(c..) an arc to the next point about the centre after c; other vN are vias at no path point)
+5: C11.1 C16.2 R17.2 U3.4 U3.8 U5.2 U5.4 | length 54.2
  Top Layer w0.35: U3.4 14.118,36.479 ; R17.2 16.579,41.354 16.143,40.918 16.143,40.268 15.01,40.268 14.118,39.375 14.118,36.458 14.118,36.337 14.755,35.7 19.825,35.7 20.2,35.325 20.246,35.325 20.325,35.325 21.5,35.325 23.25,35.325 23.85,34.725 25.704,34.725 27.12,34.725 27.325,34.93 27.325,35.446 29.635,37.756 30.829,38.95 45.4,38.95 46.05,38.3 C11.1@46.05,37.025 ; C11.1@45.55,36.85 46.05,36.35 C11.1@46.05,36.8 ; C11.1 C11.1@46.025,37.025
  Top Layer w0.45: U5.4@40.925,36.85 C11.1@45.55,36.85
+12: C9.2 C10.1 C12.2 C13.2 C14.2 D2.2 J6.1 Q1.2 R2.2 R3.2 R4.2 R5.2 R6.2 R7.1 R12.2 R18.2 R19.2 R20.2 R23.2 S1.6 U1.3 U2.8 U4.8 U5.3 U6.VCC | length 256.3
  Top Layer w0.6: C14.2 4.45,25.575 5.298,26.423 U4.8@5.298,27.785 ; R19.2@3.643,30.055 3.643,28.266 4.123,27.785 U4.8@5.298,27.785 ; U4.8@5.298,27.788 U4.8@5.298,27.785 ; R18.2 10.355,30.251 11.317,30.251 11.491,30.426 11.491,32.15 ; R5.2@18.518,20.651 18.507,20.641 17.052,20.641 16.816,20.405 16.805,20.405 16.15,19.75 16.15,17 16.65,16.5 19.587,16.5 21.087,18 S1.6 ; R5.2 R3.2 R2.2 R7.1 18.646,28.975 17.611,28.975 16.536,30.05 15.126,30.05 14.775,30.401 14.775,31.791 14.424,32.143 R20.2 11.499,32.143 11.491,32.15 ; U1.3 20.3,7.693 20.3,8.375 21.05,9.125 C9.2@23,9.125 ; C9.2 23.075,10.275 23.475,10.675 24.45,10.675 24.95,10.175 26.196,10.175 R12.2 R23.2 29.079,10.125 29.104,10.1 30.025,10.1 30.429,10.504 30.429,13.074 30.121,13.382 U2.8 30.121,16.121 30.475,16.475 31.475,16.475 31.775,16.175 C13.2 ; R4.2 29.809,25.597 R6.2 32.801,25.625 34.175,25.625 34.875,24.925 U6.VCC@35.54,24.925 ; C13.2@32.825,16.125 41.75,16.125 ; U6.VCC U6.VCC@35.54,24.925 ; C12.2@37.654,27.7 37.654,26.358 ; Q1.2 41.75,16.125 ; v1(44.225,16.575) 44.194,16.606 43.131,16.606 42.65,16.125 41.75,16.125 ; 11.491,32.15 11.491,34.416 12,34.925 19.504,34.925 19.879,34.55 22.875,34.55 24.075,33.35 27.375,33.35 28.25,34.225 28.25,35.275 31,38.025 37.725,38.025 38.525,37.225 38.525,35.124 39.874,33.775 41.85,33.775 43.225,32.4 43.225,31 43.15,30.925 C10.1 43.101,27.622 43.101,26.676 42.783,26.358 37.654,26.358 ; U6.VCC@35.54,24.925 35.54,26.153 35.745,26.358 37.654,26.358
  Bottom Layer w0.55: 30.536,2.4 D2.2
  Bottom Layer w0.6: U4.8@5.298,27.788 5.298,26.679 5.649,26.327 15.873,26.327 21.125,21.075 21.125,18.351 21.476,18 S1.6 22.7,3.825 24.175,2.35 40.925,2.35 41.95,3.375 41.95,5.975 44.975,9 47.325,9 48.3,9.975 48.3,13.7 47.15,14.85 46.475,14.85 45.975,15.35 45.975,16.6 ; v1(44.225,16.575) 44.25,16.6 45.975,16.6 ; J6.1 45.45,40.05 47.45,38.05 47.45,26.95 47.925,26.475 47.925,19.535 46.99,18.6 46.4,18.6 45.975,18.175 45.975,16.6
+24: C8.2 J1.1 J5.1 R39.2 U1.1 | length 20.3
  Top Layer w0.6: U1.1 20.321,3.154 20.321,4.149 20.723,4.55 23.675,4.55 J1.1 26.2,3.326 26.551,2.975 33.45,2.975 34.075,3.6 34.075,4.525 J5.1 34.125,4.525 35.175,4.525 35.65,4.05 R39.2
Blue: J6.2 R31.2 | length 17.3
  Bottom Layer w0.35: J6.2 43.45,40.05 46.4,37.1 R31.2
GND: C1.2 C2.2 C3.1 C4.1 C5.1 C6.2 C7.1 C8.1 C9.1 C10.2 C11.2 C12.1 C13.1 C14.1 C16.1 H1.2 J1.2 J3.2 Q2.2 Q3.2 Q4.2 Q6.2 R1.1 R9.2 R10.1 R13.2 R14.2 R15.2 R16.2 R22.1 R27.1 R30.1 R36.1 R41.3 U1.2 U2.4 U3.1 U4.3 U4.4 U5.1 U6.5 U6.6 U6.8 U6.9 U6.12 U6.13 U6.GND U7.8 U7.11 | length 432.5
  Top Layer w0.35: C5.1 3.546,37.246 6.589,40.289 U3.1 10.72,40.295 10.72,42.036 H1.2 10.747,43.465 10.957,43.675 46,43.675 48.3,41.375 48.3,40.102 ; R41.3 6.968,8.885 ; R41.3@5.05,8.9 3.125,8.9 1.4,10.625 1.4,20.325 3.125,22.05 9.3,22.05 10.378,20.972 U4.3 10.378,19.533 10.375,19.531 10.375,18.725 10.1,18.45 10.1,17.281 10.148,17.329 12.843,17.329 C3.1 12.792,18.492 12.921,18.62 U4.4@12.921,19.53 ; R15.2 R16.2 7.683,14.533 6.968,13.818 6.968,8.885 ; R15.2@11.804,14.58 14.559,14.58 R13.2@17.598,14.58 ; U4.4 12.918,21.084 13.539,21.705 R22.1 17.095,21.705 17.3,21.91 17.3,25.18 17.293,25.187 17.293,26.235 17.088,26.44 C2.2@15.89,26.44 ; R1.1 19.955,32.27 20.425,31.8 26.57,31.8 ; C4.1@22.475,36.6 25.575,36.6 25.825,36.35 C16.1@25.821,36.35 ; C8.1 23.1,1.28 22.895,1.075 18.981,1.075 18.468,1.589 18.468,5.405 ; C8.1@23.675,2.65 25.125,2.65 26.225,1.55 45.75,1.55 50.675,6.475 50.675,19.225 ; C16.1 27.45,36.625 30.927,40.102 48.3,40.102 ; J1.2 24.875,7.05 24.625,7.3 C9.1 23.075,6.08 22.87,5.875 19.897,5.875 19.427,5.405 18.468,5.405 ; U2.4 26.311,27.161 26.925,27.775 32.81,27.775 33.457,28.421 33.457,31.368 33.025,31.8 31.763,31.8 ; R9.2@26.57,30.008 26.57,31.8 ; C1.2 31.763,31.8 ; C13.1 32.9,12.697 ; J3.2@34.589,12.697 32.9,12.697 ; J3.2@35.064,12.347 J3.2@35.292,12.575 ; Q6.2 33.75,8.825 32.325,7.4 32.325,4.83 32.12,4.625 28.93,4.625 28.725,4.83 R30.1 28.725,8.325 29,8.6 30.378,8.6 32.9,11.122 32.9,12.697 ; U5.1@38.625,31 38.625,29.455 38.83,29.25 39.32,29.25 39.525,29.045 39.525,27.729 C12.1@39.554,27.7 ; U6.GND 50.675,19.225 ; C10.2 50.654,27.671 50.675,27.65 ; 6.968,8.885 6.968,7.207 8.77,5.405 U1.2 18.468,5.405 ; 26.57,31.8 31.763,31.8 ; 48.3,40.102 48.3,36.55 50.675,34.175 50.675,27.65 ; 50.675,19.225 50.675,27.65
  Top Layer w0.45: J1.2 27.3,7.05 27.8,6.55 28.575,6.55 R30.1@28.6,6.575
  Bottom Layer w0.35: R1.1@17.929,32.36 26.493,32.36 ; J1.2@26.175,7.375 26.175,9.188 27.993,11.005 27.993,13.255 C6.2 26.772,13.255 26.493,13.534 26.493,20.825 ; U7.8 36.8,25.963 36.333,26.43 26.493,26.43 ; Q4.2 36.541,29.484 33.665,32.36 26.493,32.36 ; C7.1@39.542,13.463 C7.1 39.542,10.644 R36.1 37.433,10.617 36.995,11.055 36.995,14.755 34.26,17.49 U7.11 34.23,18.739 34.23,20.825 ; Q3.2 44.468,26.068 44.375,25.975 Q2.2 34.23,20.825 ; 26.493,20.825 26.493,26.43 ; 26.493,20.825 34.23,20.825 ; 26.493,26.43 26.493,32.36
Green: J6.3 R32.2 | length 6
  Bottom Layer w0.35: J6.3@41.425,41.575 41.425,40.075 43.493,38.007 R32.2@43.493,36.409
NetC1_1: C1.1 S1.7 S1.8 S1.9 S1.10 S1.A | length 15.8
  Top Layer w0.35: S1.9 S1.8 S1.7 S1.A S1.10 24.72,27.98 25.955,27.98 26.516,28.541 29.216,28.541 30.364,29.689 C1.1
NetC2_1: C2.1 R20.1 U4.5 | length 5.5
  Top Layer w0.35: U4.5@12.918,27.785 13.998,27.785 14.568,28.355 15.897,28.355 C2.1@15.922,28.33 ; U4.5 12.875,27.981 12.875,29.075 13,29.2 13,30.122 R20.1
NetC3_2: C3.2 R25.1 R27.2 U4.1 | length 20.9
  Top Layer w0.35: U4.1 6.643,18.339 6.643,17.58 6.943,17.28 R27.2@8.016,17.28 ; R27.2@8.099,17.28 R27.2@8.016,17.28 ; C3.2@14.743,17.329 14.743,15.815 14.755,15.802 ; 15.51,15.725 15.49,15.725 15.485,15.73 13.632,15.73 13.627,15.725 8.548,15.725 8.016,16.257 R27.2@8.016,17.28 ; 15.545,15.725 18.649,15.725 20.017,14.357 R25.1
NetC4_2: C4.2 U3.5 | length 5
  Top Layer w0.445: U3.5 18.704,36.479 18.85,36.625 20.858,36.625 C4.2@21.004,36.479
NetC5_2: C5.2 C17.1 R24.2 | length 5.6
  Top Layer w0.35: C5.2@5.575,33.75 C17.1@8.32,33.75 ; C17.1 R24.2 R24.2@8.25,36.6
NetC6_1: C6.1 D2.1 S4.1 U7.16 | length 42.7
  Bottom Layer w0.35: U7.16 27.91,15.988 27.993,15.905 28.018,15.93 D2.1 30.718,15.93 30.724,15.924 31.399,15.924 31.625,15.698 31.625,3.875 32.375,3.125 38.374,3.125 39.2,3.951 39.2,6.895 39.58,7.275 42.154,7.275 44.654,9.775 46.7,9.775 47.425,10.5 47.425,12.953 47.22,13.158 S4.1@46.6,13.158
NetC7_2: C7.2 R34.2 U7.10 | length 9.3
  Bottom Layer w0.35: U7.10 35.53,17.595 36.745,16.38 R34.2@38.907,16.38 ; R34.2@39.475,16.267 39.5,16.242 39.5,15.275 39.85,14.925 41,14.925 41.475,14.45 41.475,13.496 C7.2@41.442,13.463
NetC17_2: C17.2 R18.1 U4.6 | length 8.4
  Top Layer w0.35: C17.2 10.1,32.05 9.5,31.45 8.575,31.45 8.297,31.172 R18.1 8.35,30.14 8.35,29.25 8.75,28.85 9.316,28.85 U4.6@10.378,27.788
NetH1_1: H1.1 R40.3 U3.2 U3.6 | length 36.9
  Top Layer w0.35: U3.2 12.069,39.019 12.747,39.697 12.747,40.475 ; H1.1 12.747,40.475 ; U3.6 17.226,37.749 17.477,38 22.375,38 23.525,39.15 27.605,39.15 R40.3 27.68,42.075 22.65,42.075 22.1,42.625 16.425,42.625 14.275,40.475 12.747,40.475
NetJ2_1: J2.1 R42.2 | length 6.9
  Top Layer w0.35: J2.1 45.996,7.096 46.5,7.6 46.5,9.425 46.885,9.81 47.91,9.81 48.38,10.28 48.38,11.23 R42.2
NetJ2_2: J2.2 Q1.1 Q6.1 R30.2 | length 36.2
  Top Layer w0.35: R30.2@30.6,6.575 30.745,6.72 30.745,7.645 33.5,10.4 36.65,10.4 39.375,13.125 41.6,13.125 Q1.1 ; Q6.1 38.3,6.98 38.37,7.05 38.37,7.545 38.6,7.775 40.625,7.775 40.975,8.125 40.975,11.175 41.75,11.95 Q1.1 ; J2.2 45.924,4.05 44.821,5.153 44.821,6.947 45.8,7.926 45.8,9.4 44.726,10.474 44.726,12.324 43.925,13.125 Q1.1
NetJ3_1: J3.1 R29.1 | length 2
  Top Layer w0.45: J3.1 36.746,14.7 R29.1
NetJ4_1: J4.1 J5.2 Q6.3 | length 7.8
  Top Layer w0.6: J5.2@34.1,7.1 36.298,7.1 ; Q6.3@36.309,7.866 36.309,7.1 36.309,6.666 36.972,6.003 40.38,6.003 J4.1
NetJ4_2: J4.2 R39.1 | length 2.1
  Top Layer w0.6: R39.1@38.475,4.05 J4.2 ; R39.1@38.5,4.175 R39.1
NetQ1_3: Q1.3 R29.2 | length 4
  Top Layer w0.445: R29.2 36.821,12.675 37.9,12.675 38.275,13.05 38.275,13.815 38.535,14.075 Q1.3
NetQ2_1: Q2.1 R35.1 | length 3.3
  Bottom Layer w0.445: R35.1@41.378,18.95 Q2.1@44.665,18.95
NetQ2_3: Q2.3 R31.1 | length 3.1
  Bottom Layer w0.45: Q2.3@46.35,19.875 R31.1@46.35,23
NetQ3_1: Q3.1 R37.1 | length 5.7
  Bottom Layer w0.35: R37.1 41.722,26.725 41.722,31.349 41.927,31.554 Q3.1
NetQ3_3: Q3.3 R32.1 | length 5
  Bottom Layer w0.35: R32.1@43.493,34.305 43.518,34.28 Q3.3@43.518,29.33
NetQ4_1: Q4.1 R38.1 | length 3.9
  Bottom Layer w0.35: R38.1 39.025,29.363 39.23,29.568 39.943,29.568 40.027,29.484 Q4.1
NetQ4_3: Q4.3 R33.1 | length 4.3
  Bottom Layer w0.35: Q4.3 40.159,31.484 40.75,32.075 R33.1
NetR1_2: R1.2 S1.1 | length 5.3
  Top Layer w0.35: R1.2@18.086,18.305 19.868,18.305 20.639,19.076 21.776,19.076 S1.1
NetR2_1: R2.1 S1.2 | length 2.2
  Top Layer w0.35: R2.1 20.671,26.225 21.525,26.225 21.775,25.975 22.675,25.975 S1.2
NetR3_1: R3.1 S1.3 | length 3.5
  Top Layer w0.35: R3.1 20.67,23.47 20.67,24.52 20.901,24.751 21.949,24.751 S1.3
NetR4_1: R4.1 R8.1 R10.2 | length 13.6
  Top Layer w0.35: R8.1 27.709,25.497 R4.1 27.759,26.72 28.019,26.98 33.843,26.98 34.85,27.988 R10.2@34.85,30.05
NetR5_1: R5.1 S1.4 | length 3.3
  Top Layer w0.35: R5.1 20.65,21.795 20.855,22 S1.4
NetR6_1: R6.1 R11.2 U2.1 U6.1 | length 11.2
  Top Layer w0.35: U2.1@30.23,19.822 30.819,19.822 31.08,19.562 31.719,18.922 32.83,18.922 32.852,18.9 34.025,18.9 34.35,19.225 ; R6.1 32.8,23.57 32.8,22.53 33.005,22.325 33.65,22.325 34.35,21.625 34.35,19.225 ; U6.1 34.35,19.225
NetR7_2: R7.2 R9.1 S1.5 | length 7.8
  Top Layer w0.35: R7.2@20.676,28.976 20.676,30.02 20.936,30.28 22.657,30.28 ; S1.5 22.657,28.043 22.657,30.28 ; R9.1@24.293,30.28 R9.1 23.368,30.005 23.093,30.28 22.657,30.28
NetR8_2: R8.2 R11.1 U2.3 | length 8.3
  Top Layer w0.35: U2.3 27.604,19.853 27.604,21.239 27.81,21.444 29.759,21.444 ; R8.2 29.709,21.494 29.759,21.444 ; R11.1@32.834,20.922 31.334,20.922 30.812,21.444 29.759,21.444
NetR12_1: R12.1 S2.A U2.6 | length 11.2
  Top Layer w0.35: S2.A 20.275,11.47 20.555,11.75 22.893,11.75 23.268,12.125 R12.1 ; R12.1@26.32,12.145 27.37,12.145 27.581,12.356 U2.6
NetR13_1: R13.1 S2.2 | length 2.5
  Top Layer w0.35: S2.2 17.25,11.5 R13.1@17.25,12.575
NetR14_1: R14.1 S2.3 | length 2.1
  Top Layer w0.35: S2.3 14.3,10.55 14.3,11.4 14.55,11.65 14.55,12.547 R14.1
NetR15_1: R15.1 S2.4 | length 2.3
  Top Layer w0.35: R15.1@11.741,12.555 11.741,11.33 12.275,10.797 S2.4
NetR16_1: R16.1 S2.5 | length 3.2
  Top Layer w0.35: R16.1@8.987,12.555 8.987,10.802 9.248,10.541 10.258,10.541 S2.5
NetR17_1: R17.1 R21.2 U3.7 | length 6.9
  Top Layer w0.35: U3.7 16.17,39.025 17.025,39.025 17.375,39.375 18.416,39.375 R17.1@18.466,39.325 ; R17.1 18.525,39.325 19.425,39.325 19.925,39.825 19.925,41.149 20.13,41.354 R21.2
NetR19_1: R19.1 R22.2 U4.7 | length 13.6
  Top Layer w0.35: R19.1 6.757,30.193 7.064,29.886 7.064,28.558 U4.7@7.836,27.787 ; U4.7@7.838,27.788 11.921,23.705 R22.2
NetR21_1: R21.1 R40.1 R40.2 | length 5.9
  Top Layer w0.35: R21.1 22.729,39.354 R40.1 R40.2
NetR23_1: R23.1 R28.2 U2.7 U6.2 | length 19.8
  Top Layer w0.35: R28.2@24.025,15.775 24.028,15.778 24.981,15.778 25.978,16.775 28.9,16.775 ; R23.1 29,13.4 28.85,13.55 28.85,15.029 28.851,16.726 28.9,16.775 ; U6.2 36.81,17.78 36.605,17.575 30.112,17.575 29.312,16.775 28.9,16.775
NetR24_1: R24.1 U3.3 | length 2.9
  Top Layer w0.35: R24.1@8.35,38.575 8.375,38.6 9.345,38.6 9.55,38.395 9.55,38 9.8,37.75 10.671,37.75 U3.3@10.693,37.728
NetR25_2: R25.2 R28.1 U2.5 | length 7.9
  Top Layer w0.35: R28.1@22.017,15.767 R25.2 23.375,12.975 25.429,15.029 U2.5
NetR26_1: R26.1 R41.1 R41.2 | length 5.7
  Top Layer w0.35: R41.2 R41.1 R26.1
NetR26_2: R26.2 U4.2 | length 9.2
  Top Layer w0.35: R26.2 3.05,18.225 3.45,18.625 3.45,20.15 4.375,21.075 7.55,21.075 7.821,20.804 7.821,19.7 U4.2
NetR34_1: R34.1 R36.2 S4.2 | length 11.7
  Bottom Layer w0.35: R34.1@41.475,16.267 42.533,16.267 43.3,15.5 43.3,10.617 ; R36.2 43.3,10.617 ; S4.2 44.815,11.165 44.267,10.617 43.3,10.617
NetR35_2: R35.2 U7.9 | length 2.8
  Bottom Layer w0.35: U7.9 37.734,18.709 38.025,19 R35.2
NetR37_2: R37.2 U7.6 | length 10.4
  Bottom Layer w0.35: U7.6 34.26,23.315 35.175,22.4 39.125,22.4 39.134,22.409 39.294,22.409 40.25,23.365 40.25,24.275 40.604,24.629 R37.2
NetR38_2: R38.2 U7.7 | length 6
  Bottom Layer w0.35: U7.7 35.525,24.355 35.525,23.398 35.863,23.06 36.479,23.06 38.82,23.059 39.025,23.264 R38.2
NetR42_1: R42.1 U6.3 | length 15.4
  Top Layer w0.35: U6.3 38.08,17.98 38.285,17.775 45.05,17.775 45.5,17.325 45.5,15.2 46.15,14.55 48.245,14.55 48.45,14.345 R42.1
NetS1_B: S1.B U2.2 | length 5.9
  Top Layer w0.35: S1.B@24.565,17.955 28.445,17.955 28.851,18.361 U2.2
Red: J6.4 R33.2 | length 5.6
  Bottom Layer w0.35: J6.4 39.45,40.05 40.675,38.825 R33.2@40.675,36.442
pads on no net: S2.1 U6.4 U6.10 U6.11 U7.1 U7.2 U7.3 U7.4 U7.5 U7.12 U7.13 U7.14 U7.15

## Polygon pours and split planes (outlines as drawn)
GND on Bottom Layer "GND_L02_P001" (solid, remove dead copper, pour order 1): 54.925,44.475 0.075,44.475 0.075,0.075 0.025,0.025 54.925,0.025
GND on Top Layer "GND_L01_P000" (solid, remove dead copper, pour order 0): 0,44.4 0.075,44.475 54.925,44.475 54.925,0.025 54.975,-0.025 54.95,-0.05 -0.05,-0.05 -0.05,44.45 -0.15,44.55

## Other copper
Top Layer:
  pour cut-out: 54.961,44.511 54.961,44.461 51.971,41.471 49.002,41.471 49.002,44.452 49.025,44.475 54.925,44.475
  pour cut-out: 54.961,44.511 52,41.55 52,38.493 52.012,38.505 55.02,38.505
  pour cut-out: 54.975,-0.025 52,2.95 51.976,2.926 49,2.926 49,0
  pour cut-out: 54.975,-0.025 52,2.95 52,5.993 51.996,5.998 51.998,6 55,6
  pour cut-out: -0.05,-0.05 3.074,3.074 3.074,6 -0.025,6
  pour cut-out: 3,3 6.003,3 6,2.997 6,-0.025 -0.025,-0.025 -0.05,-0.05
  pour cut-out: -0.075,44.475 2.9,41.5 3,41.5 3,38.511 2.985,38.496 2.98,38.5 0,38.5
  pour cut-out: -0.075,44.475 3.121,41.279 5.993,41.279 5.993,44.443 6.025,44.475
Bottom Layer:
  pour cut-out: 0.075,44.425 3.011,41.489 5.783,41.489 5.993,41.279 6,41.286 6,44.6
  pour cut-out: 0.075,44.475 0.075,44.425 3.011,41.489 3.011,38.502 -0.023,38.502 -0.025,38.5
  pour cut-out: 0.025,0.025 3,3 3,6.011 2.989,6 -0.025,6
  pour cut-out: 0.025,0.025 3.003,3.003 5.995,3.003 5.995,-0.02 6,-0.025
  pour cut-out: 54.925,0.05 52,2.975 52,3 49.074,3 49,2.926 49,0.025
  pour cut-out: 54.925,0.025 54.925,0.075 52,3 52.009,3.009 52.009,6.007 54.993,6.007 55,6
  pour cut-out: 54.925,44.45 51.926,41.451 51.926,38.5 51.951,38.525 55.025,38.525 55.025,44.35
  pour cut-out: 54.925,44.475 54.925,44.425 51.926,41.426 49,41.426 49,44.475 49.025,44.5

## Silkscreen, mask and mechanical layers (free items; w line width, h text height)
Bottom Solder:
  text "LED / RGB" at 36.925,40.375 h2
  text "RH SENS" at 15.125,37.375 h2
  text "RS 5-2" at 26.025,30.475 h2
  text "RS 5-1" at 21.9,12.7 h2
  text "RGB / SW" at 56.031,12.3 h2
  text "+24 V" at 29.725,0.325 h2
  text "PZT" at 37.625,0.325 h2
  text "FAN" at 43.25,0.325 h2
  text "REED" at 48.85,0.325 h2
  text "ANALOG / HUMIDIFIER / REV 1.3" at 16.558,-0.428 h2